# Altium PCB NE555.PcbDoc
Units mm, origin at the board's own origin, x right, y up, seen from the top; angles counter-clockwise.
Board outline 65 x 46 mm, 2 copper layers (Top Layer, Bottom Layer), stack 1.671 mm thick; 37 components, 28 nets, 98 pads, 25 vias.
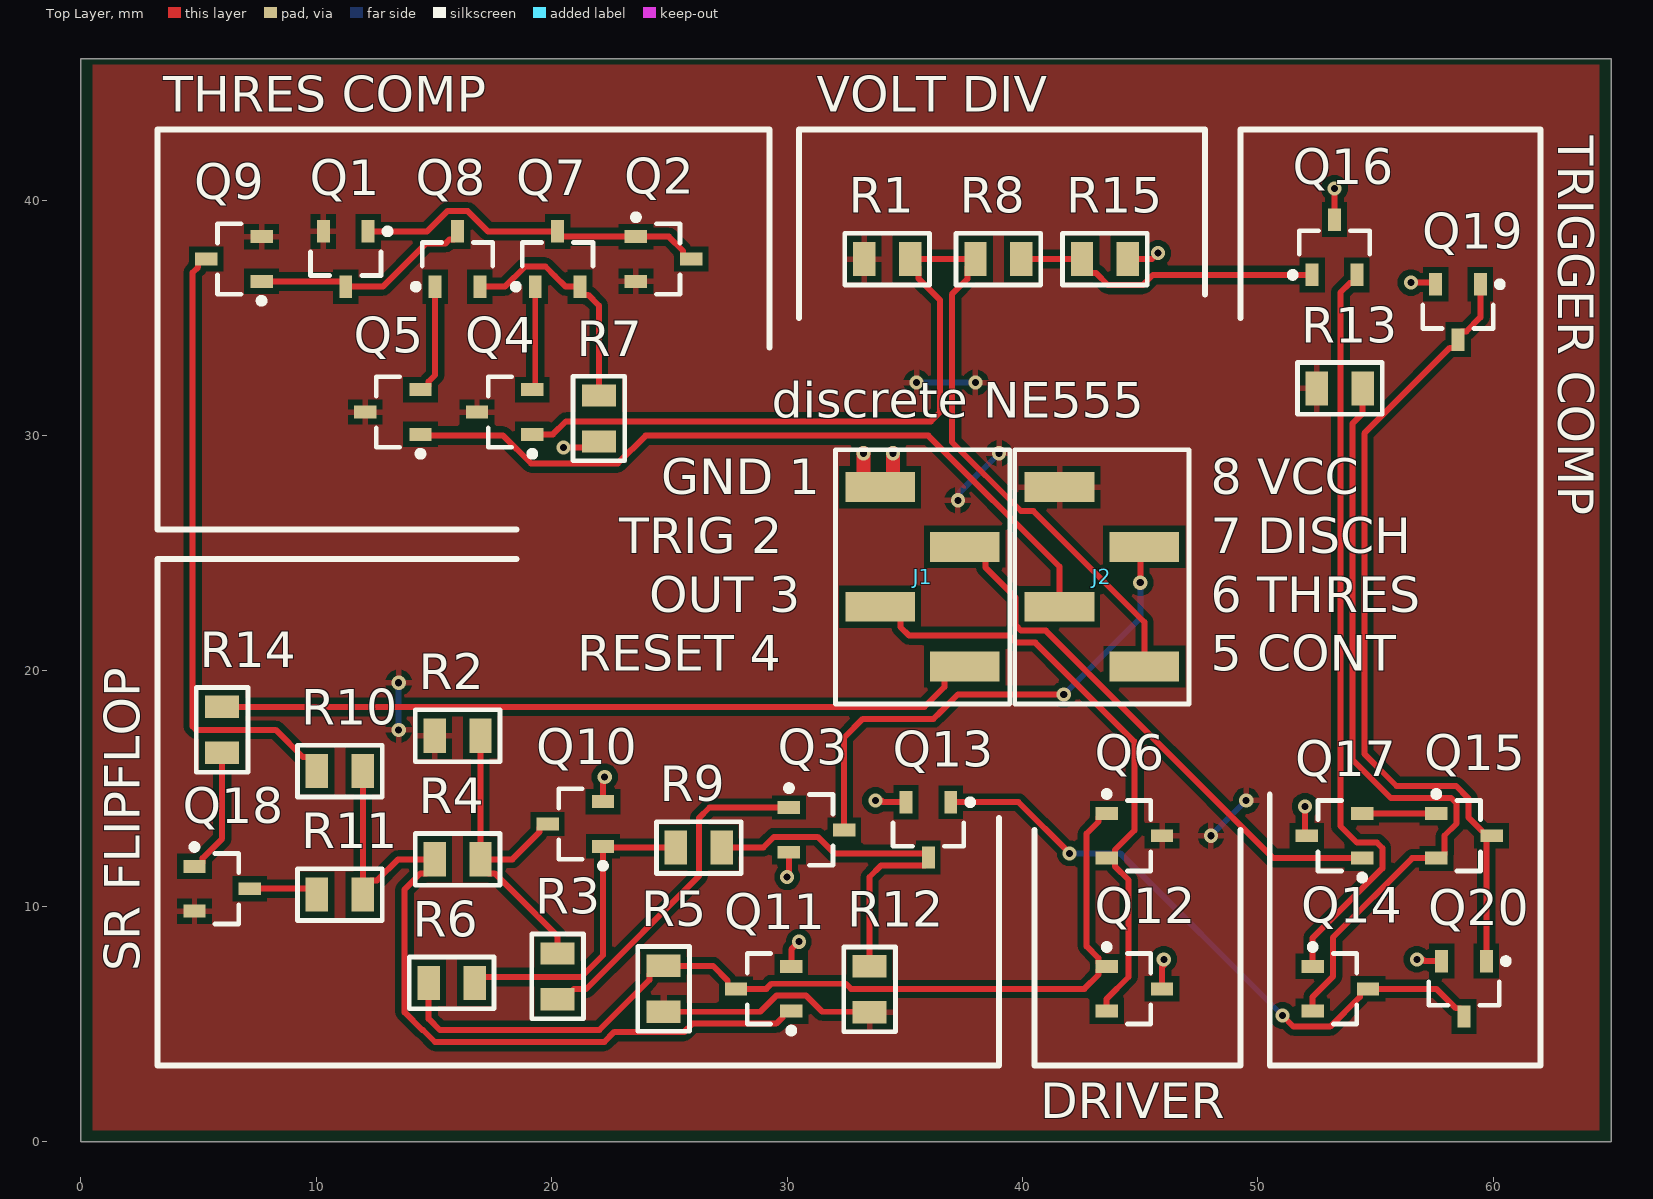
[diagram p0: Top Layer view]
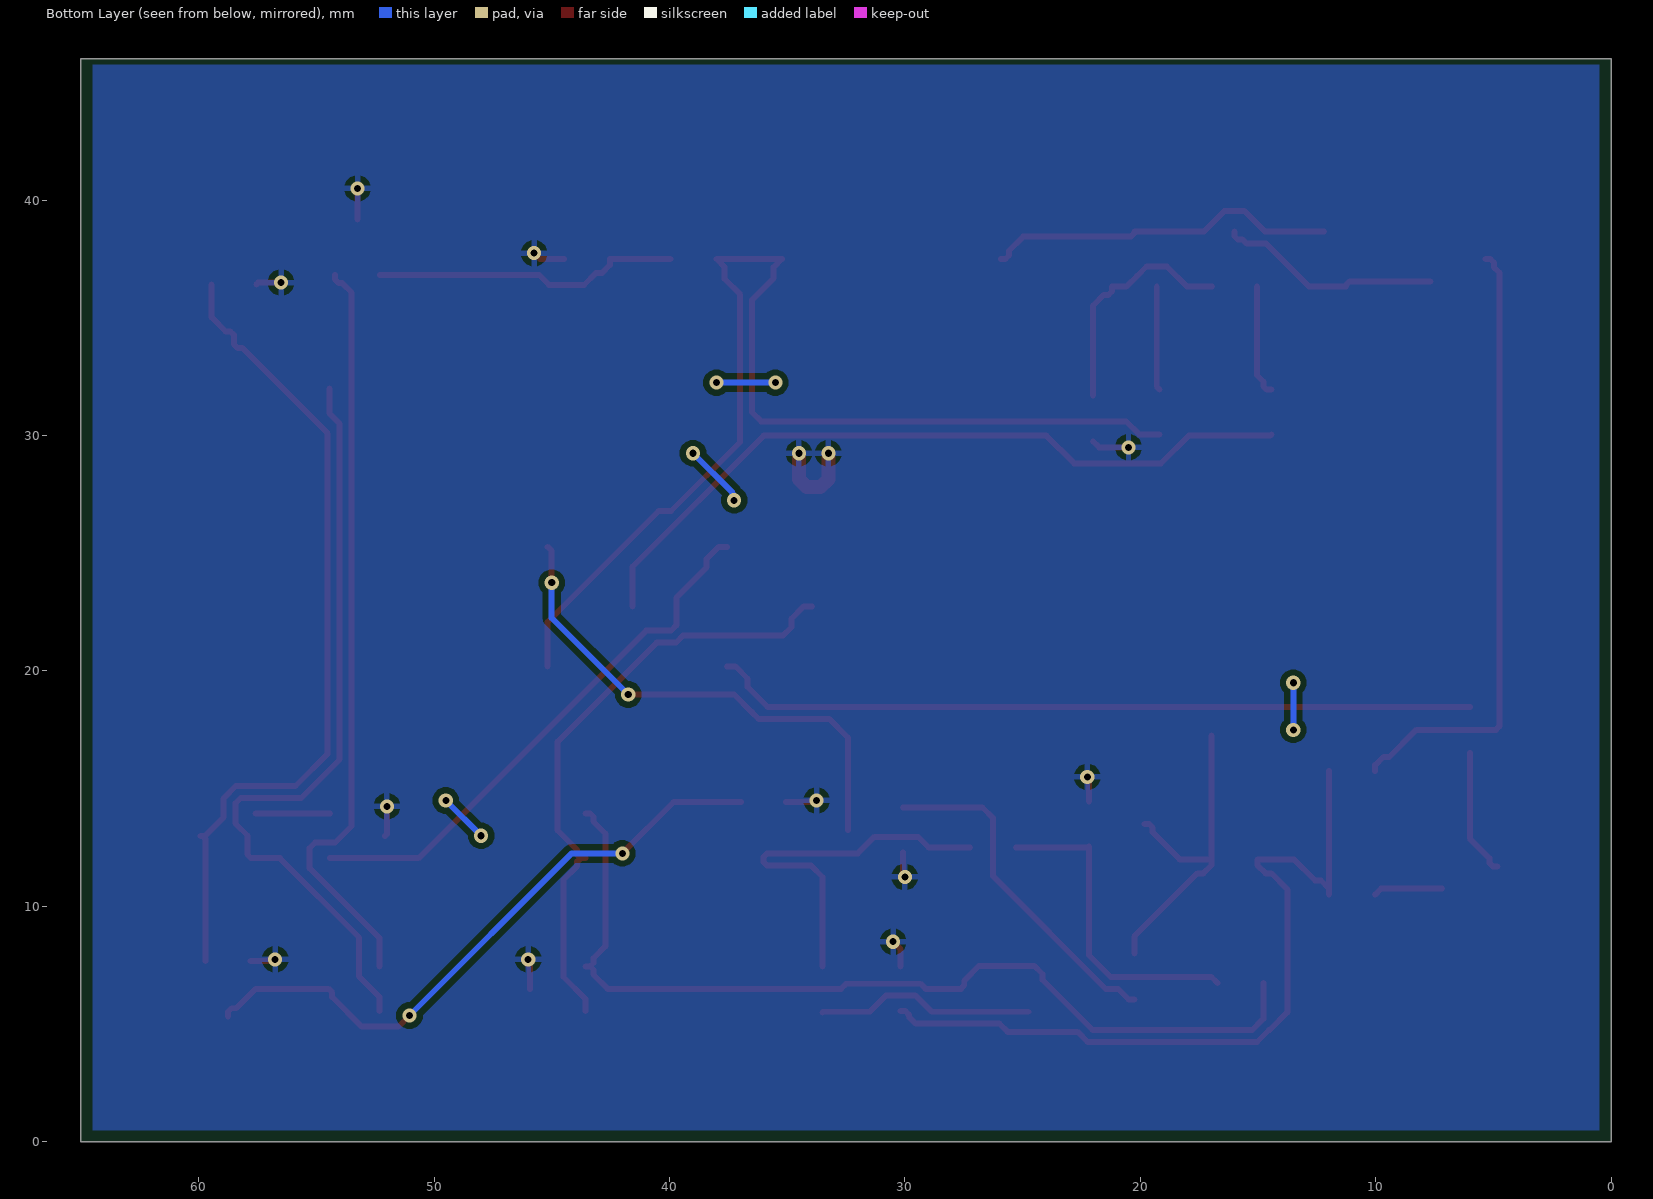
[diagram p1: Bottom Layer view, seen from below]
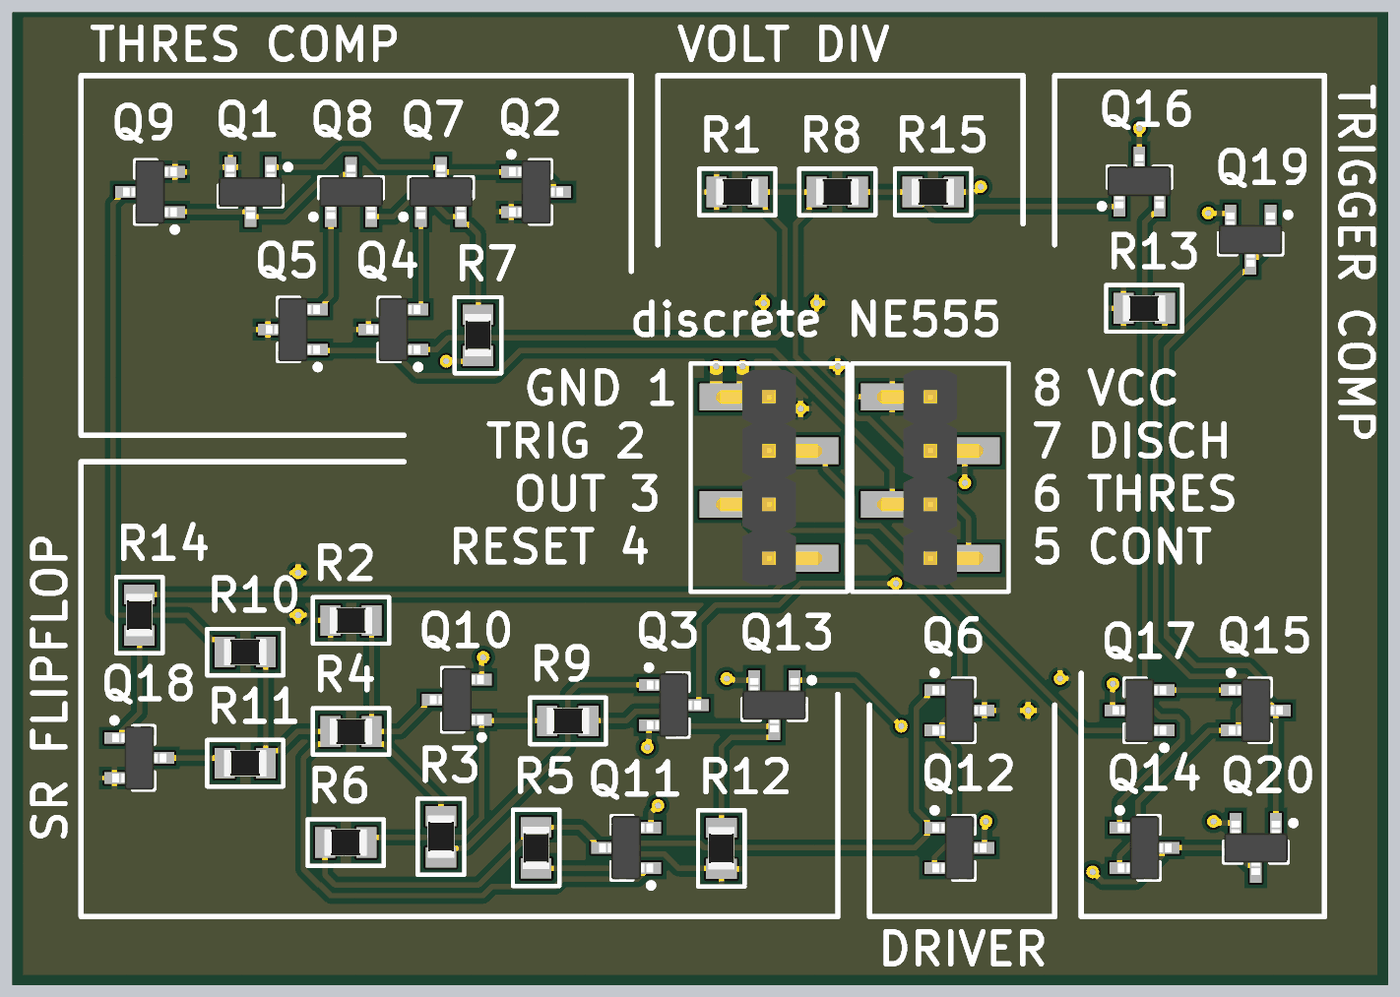
[diagram p2: 3D render of the assembled board from above, using the file's embedded part models]

## Layer stack, top to bottom
Top Solder: solder mask 0.0254, SM-001, Dk 4
Top Layer: signal copper 0.0356
Dielectric 1: dielectric 1.6, FR-4, Dk 4.8
Bottom Layer: signal copper 0.0356
Bottom Solder: solder mask 0.0254, SM-001, Dk 4

## Board outline
0,0 65,0 65,46 0,46

## Design rules (kind name [scope] priority, off if disabled: settings)
Clearance [All] p1: gap=0.254 ignorepadtopadclearanceinfootprint=FALSE except(0: Arc-Hole Track-Hole SMDPad-Hole THPad-Hole Via-Hole Fill-Hole Poly-Hole Region-Hole Text-Hole)
FabricationTestpoint [(IsPad And OnMultiLayer)] p1: side=3 testpointundercomponent=FALSE minsize=1.016 maxsize=2.54 preferedsize=1.524 minholesize=2.6 maxholesize=2.6 preferedholesize=2.6 testpointgrid=0.025 allowsidetop=TRUE allowsidebottom=TRUE usegrid=TRUE gridtolerance=0 minspacing=2 compbodyclearance=2 boardedgeclearance=2 padholecenterclearance=2 viaholecenterclearance=2
PolygonConnect [All] p1: connectstyle=Relief reliefconductorwidth=0.254 reliefentries=4 polygonreliefangle="90 Angle" airgapwidth=0.254
RoutingVias [All] p1: holewidth=0.5 width=1 viastyle="Through Hole" minholewidth=0.2 minwidth=0.45 maxholewidth=1 maxwidth=2
SilkToSolderMaskClearance [IsPad] p1: minsilkscreentomaskgap=0.1 clearancetoexposedcopper=TRUE
SolderMaskExpansion [All] p1: expansion=0.102 istentingtop=FALSE
Width [All] p1: maxlimit=0.6 minlimit=0.254 preferedwidth=0.254 minimp=50.000000 maximp=50.000000 favimp=50.000000
28 further rules are at their usual default settings.

## Components (designator, comment, footprint, x,y, rotation, side; value= is the part's Value field where it differs from the comment)
J1 "CON HEAD" "SMT 4 HEADER 2.54" 35.75,24 r0 top
J2 "CON HEAD" "SMT 4 HEADER 2.54" 43.37,24 r180 top
Q1 "2n3906 PNP" SOT95P240X110-3N 11.25,37.5 r270 top
Q2 "2n3906 PNP" SOT95P240X110-3N 24.75,37.5 r0 top
Q3 "2n3904 NPN" SOT95P240X110-3N 31.25,13.25 r0 top
Q4 "2n3904 NPN" SOT95P240X110-3N 18,31 r180 top
Q5 "2n3904 NPN" SOT95P240X110-3N 13.25,31 r180 top
Q6 "2n3904 NPN" SOT95P240X110-3N 44.75,13 r0 top
Q7 "2n3904 NPN" SOT95P240X110-3N 20.25,37.5 r90 top
Q8 "2n3904 NPN" SOT95P240X110-3N 16,37.5 r90 top
Q9 "2n3906 PNP" SOT95P240X110-3N 6.5,37.5 r180 top
Q10 "2n3904 NPN" SOT95P240X110-3N 21,13.5 r180 top
Q11 "2n3904 NPN" SOT95P240X110-3N 29,6.5 r180 top
Q12 "2n3906 PNP" SOT95P240X110-3N 44.75,6.5 r0 top
Q13 "2n3904 NPN" SOT95P240X110-3N 36,13.25 r270 top
Q14 "2n3906 PNP" SOT95P240X110-3N 53.5,6.5 r0 top
Q15 "2n3906 PNP" SOT95P240X110-3N 58.75,13 r0 top
Q16 "2n3906 PNP" SOT95P240X110-3N 53.25,38 r90 top
Q17 "2n3906 PNP" SOT95P240X110-3N 53.25,13 r180 top
Q18 "2n3906 PNP" SOT95P240X110-3N 6,10.75 r0 top
Q19 "2n3904 NPN" SOT95P240X110-3N 58.5,35.25 r270 top
Q20 "2n3904 NPN" SOT95P240X110-3N 58.75,6.5 r270 top
R1 "4k7" R0805 34.25,37.5 r0 top
R2 "1k" R0805 16,17.25 r180 top
R3 "4k7" R0805 20.25,7.025 r270 top
R4 "4k7" R0805 16,12 r0 top
R5 "1k" R0805 24.75,6.5 r270 top
R6 "4k7" R0805 15.75,6.75 r180 top
R7 "10k" R0805 22,30.725 r90 top
R8 "4k7" R0805 38.975,37.5 r0 top
R9 "4k7" R0805 26.25,12.5 r180 top
R10 "4k7" R0805 11,15.75 r0 top
R11 "4k7" R0805 11,10.5 r180 top
R12 "4k7" R0805 33.5,6.475 r90 top
R13 "10k" R0805 53.475,32 r180 top
R14 "1k" R0805 6,17.5 r90 top
R15 "4k7" R0805 43.5,37.5 r0 top

## Footprints (in the part's own frame and the unit in brackets; to place one, negate y for a bottom-side part, rotate by r counter-clockwise, add the part's x,y. Pads: shape width x height; smd on the part's side, far side on the other; paste and mask are expansions set on the pad)
R0805 [mm]
  rect 0.95x1.45 smd: 1(-0.975,0) 2(0.975,0)
  silkscreen extent -1.8,-1.1 1.8,1.1, body extent -1,-0.62 1,0.62, height 0.46
"SMT 4 HEADER 2.54" [mm]
  rect 2.96x1.27 smd: 1(-1.8,3.81) 2(1.8,1.27) 3(-1.8,-1.27) 4(1.8,-3.81)
  silkscreen extent -3.7,-5.4 3.7,5.4, body extent -2.5,-5.08 2.5,5.08, height 9.34
SOT95P240X110-3N [mm] "SOT23, 3-Leads, Body 2,90x2,40mm, Pitch 0,95mm, IPC Medium Density"
  rect 0.95x0.55 smd: 1(-1.175,0.95) 2(-1.175,-0.95) 3(1.175,0)
  silkscreen extent -1.3,-1.5 0.7,1.9, body extent -1.28,-1.5 1.28,1.5, height 1.1

## Part data
J1 J2: library part 0878980426, "CONN HEADER 4POS VERT 2.54MM SMD", Color=Black, Manufacturer=Molex, Max Operating Temperature=105°C, Min Operating Temperature=-55°C, Supplier Part Number 1=WM8617-ND, Category="Headers and Wire Housings", ComponentLink1Description=http://components.arrow.com/part/dataview/0323_02947488?src-supplier=Arrow+Europe, ComponentLink1URL=http://components.arrow.com/part/dataview/0323_02947488?src-supplier=Arrow+Europe, ComponentLink2Description=http://components.arrow.com/part/dataview/46509697S8733290N3303?src-supplier=Arrow+Electronics, ComponentLink2URL=http://components.arrow.com/part/dataview/46509697S8733290N3303?src-supplier=Arrow+Electronics, ComponentLink3Description=https://www.molex.com/pdm_docs/sd/878980426_sd.pdf?src-supplier=Digi-Key, ComponentLink3URL=https://www.molex.com/pdm_docs/sd/878980426_sd.pdf?src-supplier=Digi-Key, Connector Type="Male Pin", Contact Material="Copper Alloy", Contact Mating Length=0.23inch, Contact Plating=Tin, Depth=2.49mm, Housing Color=Black, Housing Material=Nylon, Length=10.16mm, Manufacturer Part Number=0878980426, Mount="Surface Mount", Number of Contacts=4, Number of Positions=4, Number of Rows=1, Orientation=Straight, Packaging=Rail/Tube, Pitch=2.54mm, Pricing 1="1=0,70000, 10=0,58800, 100=0,45700, 1000=0,35904, 5000=0,31552, 10000=0,29376 (USD)", Radiation Hardening=No, RoHS=Yes, Stock 1=12884, Supplier 1=Digi-Key, Termination=Solder
Q1 Q2 Q9 Q12 Q14 Q15 Q16 Q17 Q18: library part MMBT3906, "TRANS PNP 40V 0.2A SOT-23", Case/Package=SOT-23, Collector Base Voltage (VCBO)=-40V, Collector Emitter Breakdown Voltage=40V, Collector Emitter Saturation Voltage=-400mV, Current Rating=-200mA, Emitter Base Voltage (VEBO)=-5V, Frequency=250MHz, Manufacturer="ON Semiconductor / Fairchild", Max Collector Current=200mA, Max Operating Temperature=150°C, Max Power Dissipation=350mW, Min Operating Temperature=-55°C, Package Quantity=1, Supplier Part Number 1=9846832, Category=BJTs, Collector Emitter Voltage (VCEO)=40V, ComponentLink1Description=https://datasheet.ciiva.com/971/2n3906-971895.pdf?src-supplier=Digi-Key, ComponentLink1URL=https://datasheet.ciiva.com/971/2n3906-971895.pdf?src-supplier=Digi-Key, ComponentLink2Description=https://datasheet.ciiva.com/971/2n3906-971896.pdf?src-supplier=Digi-Key, ComponentLink2URL=https://datasheet.ciiva.com/971/2n3906-971896.pdf?src-supplier=Digi-Key, ComponentLink3Description=https://datasheet.ciiva.com/971/2n3906-971897.pdf?src-supplier=Digi-Key, ComponentLink3URL=https://datasheet.ciiva.com/971/2n3906-971897.pdf?src-supplier=Digi-Key, ComponentLink4Description=https://datasheet.ciiva.com/17081/mmbt3906-17081676.pdf?src-supplier=Future+Electronics, ComponentLink4URL=https://datasheet.ciiva.com/17081/mmbt3906-17081676.pdf?src-supplier=Future+Electronics, ComponentLink5Description=https://datasheet.ciiva.com/26237/mmbt3906-26237241.pdf?src-supplier=Avnet+Europe, ComponentLink5URL=https://datasheet.ciiva.com/26237/mmbt3906-26237241.pdf?src-supplier=Avnet+Europe, ComponentLink6Description=https://datasheet.ciiva.com/22653/1817590-22653485.pdf?src-supplier=Element14, ComponentLink6URL=https://datasheet.ciiva.com/22653/1817590-22653485.pdf?src-supplier=Element14, ComponentLink7Description=https://datasheet.ciiva.com/7972/1817590-7972670.pdf?src-supplier=Element14, ComponentLink7URL=https://datasheet.ciiva.com/7972/1817590-7972670.pdf?src-supplier=Element14, Element Configuration=Single, Gain Bandwidth Product=250MHz, Height=0.25inch, hFE Min=100, Lead Free="Lead Free", Length=0.25inch, Manufacturer Part Number=MMBT3906, Max Breakdown Voltage=40V, Max Frequency=250MHz, Mount="Surface Mount", Number of Elements=1, Number of Pins=3, Packaging="Tape and Reel", Polarity=PNP, Power Dissipation=350mW, Pricing 1="5=0,13300, 25=0,09010, 100=0,04710, 250=0,03920, 500=0,03140, 1000=0,02350, 5000=0,02300 (GBP)", Radiation Hardening=No, REACH SVHC="No SVHC", RoHS=Yes, Supplier 1=Farnell, Transition Frequency=250MHz, Voltage Rating (DC)=-40V, Weight=0.03g, Width=0.25inch
Q3 Q4 Q5 Q6 Q7 Q8 Q10 Q11 Q13 Q19 Q20: library part MMBT3904, "Trans Gp Bjt NPN 40V 0.2A 3-PIN SOT-23 T/r Trans Gp Bjt NPN 40V 0.2A 3-PIN SOT-23 T/r", Case/Package=SOT-23, Collector Base Voltage (VCBO)=60V, Collector Emitter Breakdown Voltage=40V, Collector Emitter Saturation Voltage=300mV, Current Rating=200mA, Emitter Base Voltage (VEBO)=6V, Frequency=300MHz, Manufacturer="ON Semiconductor / Fairchild", Max Operating Temperature=150°C, Max Power Dissipation=350mW, Min Operating Temperature=-55°C, Package Quantity=1, Supplier Part Number 1=9846727, Category=BJTs, Collector Emitter Voltage (VCEO)=40V, ComponentLink1Description=https://datasheet.ciiva.com/971/mmbt3904-971892.pdf?src-supplier=Digi-Key, ComponentLink1URL=https://datasheet.ciiva.com/971/mmbt3904-971892.pdf?src-supplier=Digi-Key, ComponentLink2Description=https://datasheet.ciiva.com/971/mmbt3904-971893.pdf?src-supplier=Digi-Key, ComponentLink2URL=https://datasheet.ciiva.com/971/mmbt3904-971893.pdf?src-supplier=Digi-Key, ComponentLink3Description=https://datasheet.ciiva.com/22653/1922793-22653482.pdf?src-supplier=Element14, ComponentLink3URL=https://datasheet.ciiva.com/22653/1922793-22653482.pdf?src-supplier=Element14, ComponentLink4Description=https://datasheet.ciiva.com/971/mmbt3904-971891.pdf?src-supplier=Digi-Key, ComponentLink4URL=https://datasheet.ciiva.com/971/mmbt3904-971891.pdf?src-supplier=Digi-Key, ComponentLink5Description=https://datasheet.ciiva.com/26237/mmbt3904-26237242.pdf?src-supplier=Avnet+Europe, ComponentLink5URL=https://datasheet.ciiva.com/26237/mmbt3904-26237242.pdf?src-supplier=Avnet+Europe, ComponentLink6Description=https://datasheet.ciiva.com/7972/2n3904-7972669.pdf?src-supplier=Element14, ComponentLink6URL=https://datasheet.ciiva.com/7972/2n3904-7972669.pdf?src-supplier=Element14, ComponentLink7Description=https://datasheet.ciiva.com/16850/mmbt3904-16850397.pdf?src-supplier=Future+Electronics, ComponentLink7URL=https://datasheet.ciiva.com/16850/mmbt3904-16850397.pdf?src-supplier=Future+Electronics, ComponentLink8Description=https://datasheet.ciiva.com/11201/mmbt3904-11201775.pdf?src-supplier=Avnet, ComponentLink8URL=https://datasheet.ciiva.com/11201/mmbt3904-11201775.pdf?src-supplier=Avnet, Contact Plating=Tin,Matte, Element Configuration=Single, Gain Bandwidth Product=300MHz, Height=0.25inch, hFE Min=100, Lead Free="Lead Free", Length=0.25inch, Manufacturer Part Number=MMBT3904, Max Breakdown Voltage=40V, Max Collector Current=200mA, Max Frequency=300MHz, Mount="Surface Mount", Number of Elements=1, Number of Pins=3, Packaging="Tape and Reel", Polarity=NPN, Power Dissipation=350mW, Pricing 1="5=0,13600, 25=0,13300, 100=0,04760, 250=0,04350, 500=0,04300, 1000=0,02200, 5000=0,02000 (GBP)", Radiation Hardening=No, REACH SVHC="No SVHC", RoHS=Yes, Stock 1=2182, Supplier 1=Farnell, Termination=SMD/SMT, Transition Frequency=300MHz, Voltage Rating (DC)=40V, Weight=0.03g, Width=0.25inch
R1 R3 R4 R6 R8 R9 R10 R11 R12 R15: library part CRCW08054K70FKEA, "VISHAY - CRCW08054K70FKEA - Resistencia SMD de Tipo Chip, Película Gruesa, 0805 [Métrica 2012], 4.7 kohm, Serie CRCW, 150 V", Case Code (Imperial)=0805, Case Code (Metric)=2012, Manufacturer=Vishay, Max Operating Temperature=155°C, Max Power Dissipation=125mW, Min Operating Temperature=-55°C, Package Quantity=10, Resistance=4.7kR, Resistor Type="Thick Film", Supplier Part Number 1=541-4.70KCCT-ND, Temperature Coefficient=100ppm/°C, Tolerance=1%, Voltage Rating=150V, Case/Package=0805, Category="Chip SMD Resistors", ComponentLink1Description=https://datasheet.ciiva.com/11808/0900766b80d98b26-11808992.pdf?src-supplier=RSComponents, ComponentLink1URL=https://datasheet.ciiva.com/11808/0900766b80d98b26-11808992.pdf?src-supplier=RSComponents, ComponentLink2Description=https://datasheet.ciiva.com/16213/dcrcwe3-16213733.pdf?src-supplier=Future+Electronics, ComponentLink2URL=https://datasheet.ciiva.com/16213/dcrcwe3-16213733.pdf?src-supplier=Future+Electronics, ComponentLink3Description=https://datasheet.ciiva.com/16720/70201119-16720438.pdf?src-supplier=Allied+Electronics, ComponentLink3URL=https://datasheet.ciiva.com/16720/70201119-16720438.pdf?src-supplier=Allied+Electronics, ComponentLink4Description=https://datasheet.ciiva.com/5550/dcrcwe3-109170-5550903.pdf?src-supplier=Mouser, ComponentLink4URL=https://datasheet.ciiva.com/5550/dcrcwe3-109170-5550903.pdf?src-supplier=Mouser, ComponentLink5Description=https://datasheet.ciiva.com/26317/fld-crcw-e3-data-en-26317145.pdf?src-supplier=Distrelec, ComponentLink5URL=https://datasheet.ciiva.com/26317/fld-crcw-e3-data-en-26317145.pdf?src-supplier=Distrelec, ComponentLink6Description=https://datasheet.ciiva.com/9071/dcrcwe3-9071196.pdf?src-supplier=Avnet, ComponentLink6URL=https://datasheet.ciiva.com/9071/dcrcwe3-9071196.pdf?src-supplier=Avnet, ComponentLink7Description=https://datasheet.ciiva.com/2467/dcrcwe3-2467437.pdf?src-supplier=Digi-Key, ComponentLink7URL=https://datasheet.ciiva.com/2467/dcrcwe3-2467437.pdf?src-supplier=Digi-Key, ComponentLink8Description=https://datasheet.ciiva.com/2467/dcrcwe3-2467438.pdf?src-supplier=Digi-Key, ComponentLink8URL=https://datasheet.ciiva.com/2467/dcrcwe3-2467438.pdf?src-supplier=Digi-Key, ComponentLink9Description=https://datasheet.ciiva.com/2467/dcrcwe3-2467439.pdf?src-supplier=Digi-Key, ComponentLink9URL=https://datasheet.ciiva.com/2467/dcrcwe3-2467439.pdf?src-supplier=Digi-Key, Contact Plating=Tin, Depth=1.25mm, Features="Automotive AEC-Q200", Height=0.45mm, Lead Free="Lead Free", Length=2mm, Manufacturer Part Number=CRCW08054K70FKEA, Military Standard=Not, Number of Terminations=2, Packaging="Tape and Reel", Power Rating=125mW, Pricing 1="1=0,10000, 10=0,05700, 100=0,02310, 1000=0,01039, 2500=0,00902 (USD)", Radiation Hardening=No, REACH SVHC=Unknown, RoHS=Yes, Stock 1=78446, Supplier 1=Digi-Key, Termination=SMD/SMT, Voltage Rating (DC)=150V, Weight=0.000194oz, Width=1.25mm
R2 R5 R14: library part CRCW08051K00FKEA, "Res Thick Film 0805 1K Ohm 1% 0.125W(1/8W) ±100ppm/C Pad SMD Automotive T/R", Case Code (Imperial)=0805, Case Code (Metric)=2012, Manufacturer="Vishay Dale", Max Operating Temperature=155°C, Min Operating Temperature=-55°C, Package Quantity=5000, Power Rating=125mW, Resistance=1kR, Resistor Type="Thick Film", Supplier Part Number 1=541-1.00KCCT-ND, Temperature Coefficient=100ppm/°C, Tolerance=1%, Voltage Rating=150V, Case/Package=0805, Category="Chip SMD Resistors", ComponentLink1Description=https://datasheet.ciiva.com/11808/0900766b80d98b26-11808530.pdf?src-supplier=RSComponents, ComponentLink1URL=https://datasheet.ciiva.com/11808/0900766b80d98b26-11808530.pdf?src-supplier=RSComponents, ComponentLink2Description=https://datasheet.ciiva.com/46381/1697337-46381606.pdf?src-supplier=Element14, ComponentLink2URL=https://datasheet.ciiva.com/46381/1697337-46381606.pdf?src-supplier=Element14, ComponentLink3Description=https://datasheet.ciiva.com/3258/dcrcwe3-3258215.pdf?src-supplier=Avnet, ComponentLink3URL=https://datasheet.ciiva.com/3258/dcrcwe3-3258215.pdf?src-supplier=Avnet, ComponentLink4Description=https://datasheet.ciiva.com/26312/fld-crcw-e3-data-en-26312922.pdf?src-supplier=Distrelec, ComponentLink4URL=https://datasheet.ciiva.com/26312/fld-crcw-e3-data-en-26312922.pdf?src-supplier=Distrelec, ComponentLink5Description=https://datasheet.ciiva.com/46441/1720486-46441626.pdf?src-supplier=Element14, ComponentLink5URL=https://datasheet.ciiva.com/46441/1720486-46441626.pdf?src-supplier=Element14, ComponentLink6Description=https://datasheet.ciiva.com/16213/dcrcwe3-16213643.pdf?src-supplier=Future+Electronics, ComponentLink6URL=https://datasheet.ciiva.com/16213/dcrcwe3-16213643.pdf?src-supplier=Future+Electronics, ComponentLink7Description=https://datasheet.ciiva.com/17204/dcrcwe3-17204396.pdf?src-supplier=Avnet+Europe, ComponentLink7URL=https://datasheet.ciiva.com/17204/dcrcwe3-17204396.pdf?src-supplier=Avnet+Europe, Contact Plating=Tin, Depth=1.25mm, Height=0.45mm, Lead Free="Lead Free", Length=2mm, Manufacturer Part Number=CRCW08051K00FKEA, Military Standard=Not, Number of Pins=2, Packaging="Tape and Reel", Pricing 1="1=0,10000, 10=0,05700, 100=0,02310, 1000=0,01039, 2500=0,00902 (USD)", Radiation Hardening=No, REACH SVHC=Unknown, RoHS=Yes, Stock 1=319183, Supplier 1=Digi-Key, Termination=SMD/SMT, Voltage Rating (DC)=150V, Weight=0.000194oz, Width=1.25mm
R7 R13: library part CRCW080510K0FKEA, "VISHAY - CRCW080510K0FKEA - SMD Chip Resistor, 0805 [2012 Metric], 10 kohm, CRCW e3 Series, 150 V, Thick Film, 125 mW", Case Code (Imperial)=0805, Case Code (Metric)=2012, Manufacturer=Vishay, Max Operating Temperature=155°C, Min Operating Temperature=-55°C, Package Quantity=5000, Power Rating=125mW, Resistance=10kR, Resistor Type="Thick Film", Supplier Part Number 1=541-10.0KCCT-ND, Temperature Coefficient=100ppm/°C, Tolerance=1%, Voltage Rating=150V, Case/Package=0805, Category="Chip SMD Resistors", ComponentLink1Description=https://datasheet.ciiva.com/11808/0900766b80d98b26-11808216.pdf?src-supplier=RSComponents, ComponentLink1URL=https://datasheet.ciiva.com/11808/0900766b80d98b26-11808216.pdf?src-supplier=RSComponents, ComponentLink2Description=https://datasheet.ciiva.com/5547/dcrcwe3-109170-5547559.pdf?src-supplier=Mouser, ComponentLink2URL=https://datasheet.ciiva.com/5547/dcrcwe3-109170-5547559.pdf?src-supplier=Mouser, ComponentLink3Description=https://datasheet.ciiva.com/16719/70201119-16719082.pdf?src-supplier=Allied+Electronics, ComponentLink3URL=https://datasheet.ciiva.com/16719/70201119-16719082.pdf?src-supplier=Allied+Electronics, ComponentLink4Description=https://datasheet.ciiva.com/16514/dcrcwe3-16514907.pdf?src-supplier=Avnet+Asia, ComponentLink4URL=https://datasheet.ciiva.com/16514/dcrcwe3-16514907.pdf?src-supplier=Avnet+Asia, ComponentLink5Description=https://datasheet.ciiva.com/16883/dcrcwe3-16883708.pdf?src-supplier=Avnet+Europe, ComponentLink5URL=https://datasheet.ciiva.com/16883/dcrcwe3-16883708.pdf?src-supplier=Avnet+Europe, ComponentLink6Description=https://datasheet.ciiva.com/8337/dcrcwe3-8337773.pdf?src-supplier=Avnet, ComponentLink6URL=https://datasheet.ciiva.com/8337/dcrcwe3-8337773.pdf?src-supplier=Avnet, ComponentLink7Description=https://datasheet.ciiva.com/16755/70201119-16755389.pdf?src-supplier=Allied+Electronics, ComponentLink7URL=https://datasheet.ciiva.com/16755/70201119-16755389.pdf?src-supplier=Allied+Electronics, ComponentLink8Description=https://datasheet.ciiva.com/46394/1720486-46394381.pdf?src-supplier=Element14, ComponentLink8URL=https://datasheet.ciiva.com/46394/1720486-46394381.pdf?src-supplier=Element14, ComponentLink9Description=https://datasheet.ciiva.com/8337/dcrcwe3-8337774.pdf?src-supplier=Avnet, ComponentLink9URL=https://datasheet.ciiva.com/8337/dcrcwe3-8337774.pdf?src-supplier=Avnet, ComponentLink10Description=https://datasheet.ciiva.com/16199/dcrcwe3-16199086.pdf?src-supplier=Future+Electronics, ComponentLink10URL=https://datasheet.ciiva.com/16199/dcrcwe3-16199086.pdf?src-supplier=Future+Electronics, Contact Plating=Tin, Depth=1.25mm, Height=0.45mm, Lead Free="Lead Free", Length=2mm, Manufacturer Part Number=CRCW080510K0FKEA, Military Standard=Not, Packaging="Tape and Reel", Pricing 1="1=0,10000, 10=0,05700, 100=0,02310, 1000=0,01039, 2500=0,00902 (USD)", Radiation Hardening=No, REACH SVHC=Unknown, RoHS=Yes, Stock 1=111958, Supplier 1=Digi-Key, Termination=SMD/SMT, Voltage Rating (DC)=150V, Weight=0.000194oz, Width=1.25mm

## Via types
v1: diameter 0.6, hole 0.3, Top Layer to Bottom Layer, 25 vias

## Nets (pads, with @x,y where several pads share a name; then routed paths per layer and width w, separated by ;. In a path a pad name is that pad's centre, name@x,y a point inside that pad or via, vN(x,y) a via of type N, cw(c..) or ccw(c..) an arc to the next point about the centre after c; other vN are vias at no path point)
"Control Voltage": J2.1 Q4.1 R1.2 R8.1 | length 48.9
  Top Layer w0.254: Q4.1 20.05,30.05 20.606,30.606 36.106,30.606 36.5,31 36.5,35.75 35.573,36.677 35.573,37.152 R1.2 R8.1 37.652,37.152 37.652,36.652 37,36 37,29.726 39.932,26.794 40.456,26.794 45.17,22.08 J2.1
Discharge: J2.3 Q3.3 | length 21.7
  Top Layer w0.254: Q3.3 32.425,17.175 33.217,17.967 36.217,17.967 36.5,18.25 37.25,19 v1(41.75,19) ; v1(45,23.75) 45,25.1 J2.3
  Bottom Layer w0.254: v1(41.75,19) 45,22.25 v1(45,23.75)
GND: J1.1 Q3.2 Q10.2 Q11.2 Q12.3 Q13.2 Q16.3 Q17.3 Q19.2 Q20.2 R7.1 R15.2 | length 17.4
  Top Layer w0.254: v1(20.5,29.5) 21.75,29.5 R7.1 ; Q10.2 22.175,15.425 v1(22.25,15.5) ; v1(30,11.25) 30.075,11.325 Q3.2 ; Q11.2 30.175,8.175 v1(30.5,8.5) ; v1(33.75,14.5) 34,14.5 34.075,14.425 Q13.2 ; R15.2 45.5,37.5 v1(45.75,37.75) ; Q12.3 45.925,7.425 46,7.5 v1(46,7.75) ; v1(52,14.25) 52,13.075 Q17.3 ; Q16.3 v1(53.25,40.5) ; v1(56.5,36.5) 57.475,36.5 Q19.2 ; v1(56.75,7.75) 57,7.75 57.075,7.675 Q20.2
  Top Layer w0.6: v1(33.25,29.25) 33.25,28.145 33.585,27.81 J1.1 34.165,27.81 34.5,28.145 v1(34.5,29.25)
NetQ1_1: Q1.1 Q2.1 Q2.3 Q7.3 | length 15.1
  Top Layer w0.254: Q1.1 14.711,38.675 15.567,39.531 16.433,39.531 17.289,38.675 Q7.3 20.25,38.598 20.398,38.45 Q2.1 24.975,38.45 25.577,37.848 25.577,37.648 25.725,37.5 Q2.3
NetQ1_3: Q1.3 Q8.3 Q9.1 | length 9.6
  Top Layer w0.254: Q9.1 11.102,36.55 11.25,36.402 Q1.3 12.825,36.325 14.667,38.167 15.492,38.167 15.652,38.327 15.852,38.327 16,38.475 Q8.3
NetQ3_1: Q3.1 R3.2 | length 14.6
  Top Layer w0.254: R3.2 20.5,6.05 20.942,6.492 21.46,6.492 26.25,11.282 26.25,13.75 26.7,14.2 Q3.1
NetQ4_2: Q4.2 Q7.1 | length 4.4
  Top Layer w0.254: Q4.2 19.3,32.075 Q7.1
NetQ5_2: Q5.2 Q8.1 | length 4.8
  Top Layer w0.254: Q5.2 14.625,31.95 14.773,32.098 14.773,32.298 15.05,32.575 Q8.1
NetQ6_1: Q6.1 Q11.3 Q12.1 R5.1 R6.2 | length 40.2
  Top Layer w0.254: R6.2 14.775,5.225 15.25,4.75 22.025,4.75 24.152,6.877 24.152,7.127 24.5,7.475 R5.1 26.85,7.475 27.477,6.848 27.477,6.648 27.625,6.5 29.118,6.5 29.332,6.714 32.497,6.714 32.711,6.5 42.625,6.5 43.227,7.102 43.227,7.302 Q12.1@43.375,7.45 ; Q12.1 Q12.1@43.375,7.45 ; Q6.1 43.375,13.95 43.227,13.802 43.227,13.602 42.719,13.094 42.719,8.306 43.227,7.798 43.227,7.598 Q12.1@43.375,7.45
NetQ7_2: Q7.2 Q8.2 R7.2 | length 10
  Top Layer w0.254: Q8.2 18.011,36.325 18.867,37.181 19.733,37.181 20.138,36.775 20.589,36.325 Q7.2 21.2,36.125 21.348,35.977 21.548,35.977 22,35.525 R7.2
NetQ9_3: Q9.3 R10.1 | length 26.4
  Top Layer w0.254: Q9.3 5.125,37.5 4.977,37.352 4.977,37.152 4.75,36.925 4.75,17.649 4.899,17.5 8.275,17.5 9.427,16.348 9.677,16.348 10.025,16 R10.1
NetQ10_1: Q10.1 R6.1 R9.2 | length 13.7
  Top Layer w0.254: R6.1 16.975,7 21.25,7 22.175,7.925 Q10.1 22.225,12.5 R9.2
NetQ10_3: Q10.3 R2.1 R3.1 R4.2 | length 14.3
  Top Layer w0.254: R2.1 R4.2 ; Q10.3 19.625,13.5 19.477,13.352 19.477,13.152 18.325,12 R4.2 ; R3.1 20.25,8.725 17.573,11.402 17.323,11.402 16.975,11.75 R4.2
NetQ11_1: Q11.1 R4.1 R10.2 R11.1 | length 33.5
  Top Layer w0.254: R11.1 R11.1@11.975,10.75 ; R10.2 R11.1@11.975,10.75 ; Q11.1 29.975,5.55 29.827,5.402 29.827,5.315 29.529,5.017 25.981,5.017 25.633,4.669 22.662,4.669 22.235,4.242 15.04,4.242 14.532,4.75 14.5,4.75 13.75,5.5 13.75,10.725 14.427,11.402 14.677,11.402 15.025,11.75 R4.1 13.475,12 12.573,11.098 12.323,11.098 R11.1@11.975,10.75
NetQ13_1: Q13.1 Q14.3 Q20.3 | length 27.1
  Top Layer w0.254: Q13.1 39.825,14.425 v1(42,12.25) ; v1(51.042,5.364) 51.512,4.894 53.069,4.894 54.327,6.152 54.327,6.352 54.475,6.5 Q14.3 57.575,6.5 58.402,5.673 58.602,5.673 58.75,5.525 Q20.3
  Bottom Layer w0.254: v1(42,12.25) 44.156,12.25 v1(51.042,5.364)
NetQ13_3: Q13.3 R9.1 R12.2 | length 16.1
  Top Layer w0.254: R9.1 28.986,12.5 29.442,12.956 31.294,12.956 32,12.25 35.852,12.25 36,12.102 36,11.875 35.852,11.727 33.977,11.727 33.5,11.25 R12.2
NetQ14_1: Q14.1 Q16.2 | length 32.2
  Top Layer w0.254: Q14.1 52.325,8.661 55.281,11.617 55.281,12.483 55.058,12.706 54.208,12.706 53.5,13.414 53.5,36.078 53.899,36.477 54.052,36.477 54.2,36.625 Q16.2
NetQ14_2: Q14.2 Q15.2 R13.1 | length 33.2
  Top Layer w0.254: Q14.2 52.325,6.161 53.181,7.017 53.181,8.681 56.55,12.05 57.775,12.05 57.923,12.198 57.923,13.009 58.431,13.517 58.431,14.383 58.208,14.606 55.644,14.606 54.008,16.242 54.008,30.508 54.45,30.95 R13.1
NetQ15_1: Q15.1 Q17.2 | length 3.2
  Top Layer w0.254: Q17.2 Q15.1
NetQ15_3: Q15.3 Q19.1 Q19.3 Q20.1 | length 34.9
  Top Layer w0.254: Q19.1 59.45,35.025 58.848,34.423 58.648,34.423 58.5,34.275 Q19.3 58.5,33.875 58.352,33.727 58.152,33.727 54.516,30.091 54.516,16.484 55.886,15.114 58.418,15.114 58.939,14.593 58.939,13.786 59.725,13 Q15.3 ; Q20.1 59.7,12.852 Q15.3@59.848,13
NetQ16_1: Q16.1 R8.2 R15.1 | length 13.1
  Top Layer w0.254: R8.2 R15.1 42.525,37.25 42.873,36.902 43.123,36.902 43.631,36.394 45.108,36.394 45.539,36.825 Q16.1
NetQ18_1: Q18.1 R14.1 | length 5.4
  Top Layer w0.254: Q18.1 5.025,11.7 5.173,11.848 5.173,12.048 6,12.875 R14.1
NetQ18_3: Q18.3 R11.2 | length 3
  Top Layer w0.254: Q18.3 9.775,10.75 R11.2
Output: J1.3 Q6.2 Q12.2 | length 26.1
  Top Layer w0.254: J1.3 34.309,22.73 34.817,22.222 34.817,21.863 35.18,21.5 39.428,21.5 39.722,21.206 40.544,21.206 44.75,17 44.75,13.225 43.923,12.398 43.923,12.198 Q6.2@43.775,12.05 ; Q12.2 43.575,6.075 44.5,7 44.5,11.125 43.923,11.702 43.923,11.902 Q6.2@43.775,12.05 ; Q6.2 Q6.2@43.775,12.05
Reset: J1.4 R14.2 | length 32.5
  Top Layer w0.254: R14.2 35.835,18.475 36.683,19.323 36.683,19.682 37.191,20.19 J1.4
Threshold: J2.2 Q5.1 | length 32.2
  Top Layer w0.254: Q5.1 14.475,30 17.936,30 19.117,28.819 22.808,28.819 23.989,30 36,30 41.57,24.43 J2.2
Trigger: J1.2 Q17.1 | length 23.2
  Top Layer w0.254: J1.2 37.909,25.27 38.417,24.762 38.417,24.403 39.709,23.111 39.709,21.937 39.932,21.714 40.992,21.714 50.656,12.05 Q17.1
VCC: J2.4 Q1.2 Q2.2 Q4.3 Q5.3 Q6.3 Q9.2 Q18.2 R1.1 R2.2 R5.2 R12.1 R13.2 | length 18.7
  Top Layer w0.254: R5.2 28.861,5.525 29.542,6.206 30.808,6.206 31.489,5.525 33.475,5.525 R12.1
  Bottom Layer w0.254: v1(13.5,17.5) v1(13.5,19.5) ; v1(35.5,32.25) v1(38,32.25) ; v1(37.25,27.25) 37.316,27.316 37.316,27.566 v1(39,29.25) ; v1(48,13) v1(49.5,14.5)

## Polygon pours and split planes (outlines as drawn)
GND on Bottom Layer "GND_L02_P001" (solid, pour order 1): 0.5,0.5 64.5,0.5 64.5,45.75 0.5,45.75
VCC on Top Layer "VCC_L01_P000" (solid, pour order 0): 0.5,0.5 64.5,0.5 64.5,45.75 0.5,45.75

## Silkscreen, mask and mechanical layers (free items; w line width, h text height)
Top Overlay:
  lines w0.254: 18.5,24.75 3.25,24.75 3.25,3.25 39,3.25 39,13.75 ; 18.5,26 3.25,26 3.25,43 3.75,43 29.25,43 29.25,33.75 ; 30.5,35 30.5,43 47.75,43 47.75,36 ; 40.5,13.25 40.5,3.25 49.25,3.25 49.25,13.25 ; 49.25,35 49.25,43 62,43 62,3.25 50.5,3.25 50.5,14.75
  text "THRES COMP" at 3.504,43.754 h1.52
  text "VOLT DIV" at 31.254,43.754 h1.52
  text "TRIGGER COMP" at 62.754,42.746 h1.52 r270
  text "discrete NE555" at 29.343,30.754 h1.52
  text "GND 1" at 24.644,27.504 h1.52
  text "8 VCC" at 48.004,27.504 h1.52
  text "TRIG 2" at 22.867,25.004 h1.52
  text "7 DISCH" at 48.004,25.004 h1.52
  text "OUT 3" at 24.136,22.504 h1.52
  text "6 THRES" at 48.004,22.504 h1.52
  text "RESET 4" at 21.089,20.004 h1.52
  text "5 CONT" at 48.004,20.004 h1.52
  text "SR FLIPFLOP" at 2.496,7.249 h1.52 r90
  text "DRIVER" at 40.754,1.004 h1.52
Board Outline:
  the board outline again, w0.1